# Altium PCB Hardware_PID.PcbDoc
Units mil, origin at the board's own origin, x right, y up, seen from the top; angles counter-clockwise.
Board outline 6000 x 4000 mil, 2 copper layers (Top Layer, Bottom Layer); 50 components, 21 nets, 300 pads, 0 vias.
Unrouted connection lines stored in the file: 48.
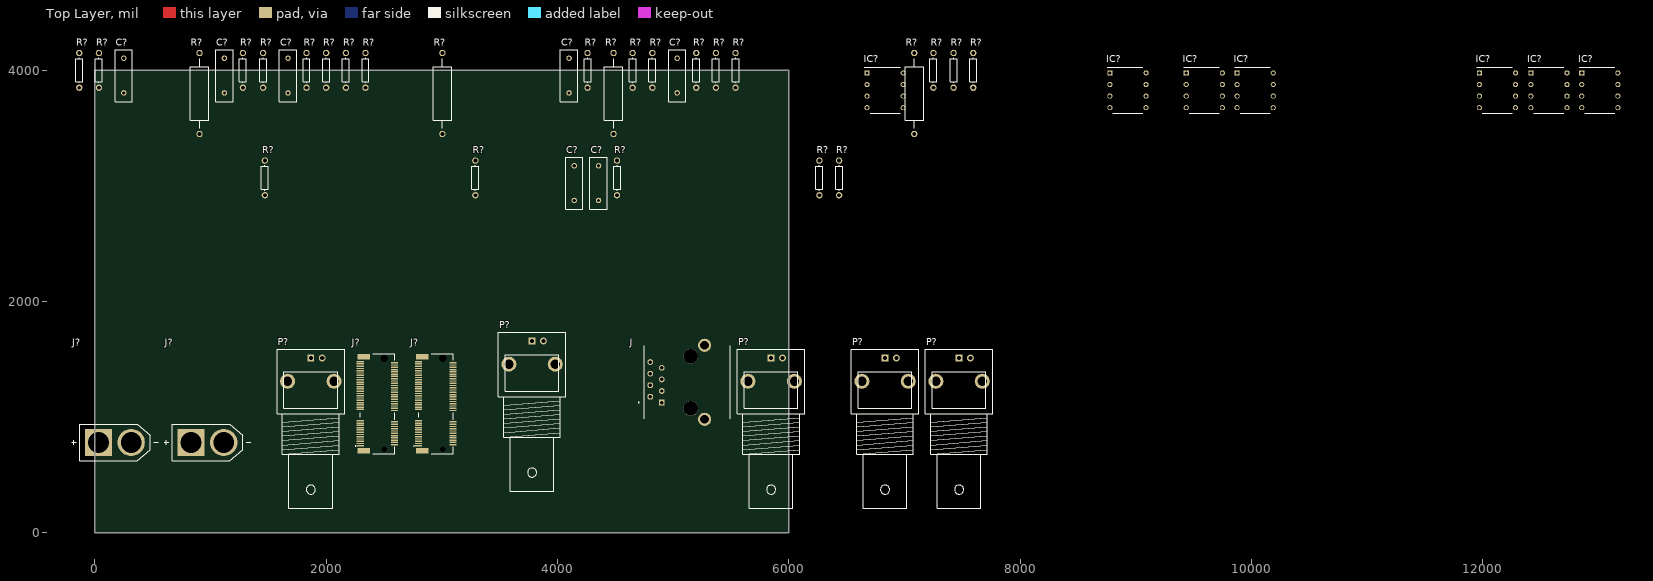
[diagram p0: Top Layer view]
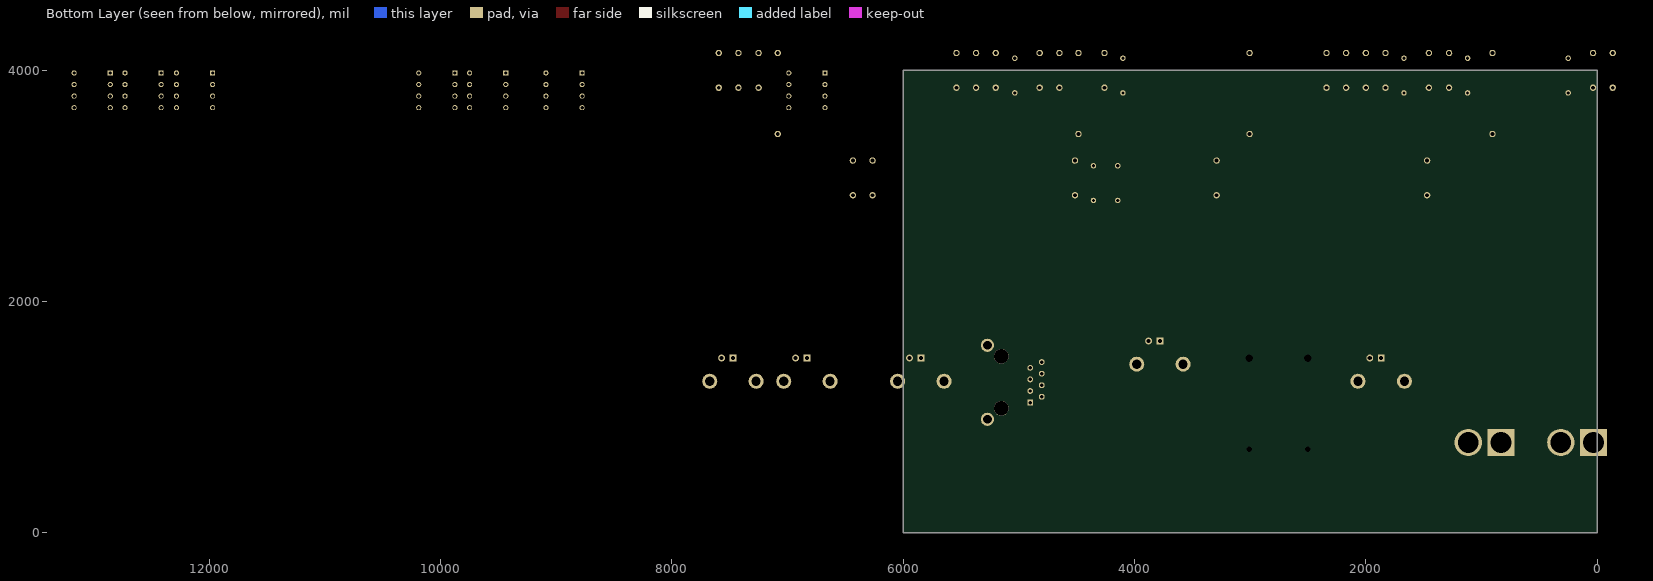
[diagram p1: Bottom Layer view, seen from below]

## Layer stack, top to bottom
Top Solder: solder mask 0.4, Solder Resist, Dk 3.5
Top Layer: signal copper 1.4
Dielectric 1: dielectric 12.6, FR-4, Dk 4.8
Bottom Layer: signal copper 1.4
Bottom Solder: solder mask 0.4, Solder Resist, Dk 3.5

## Board outline
0,0 6000,0 6000,4000 0,4000

## Design rules (kind name [scope] priority, off if disabled: settings)
Clearance [All] p1: gap=10 ignorepadtopadclearanceinfootprint=FALSE except(0: Arc-Hole Track-Hole SMDPad-Hole THPad-Hole Via-Hole Fill-Hole Poly-Hole Region-Hole Text-Hole)
PolygonConnect [All] p1: connectstyle=Relief reliefconductorwidth=10 reliefentries=4 polygonreliefangle="90 Angle" airgapwidth=10
RoomDefinition Sheet2 [InComponentClass('Sheet2')] p1: confinementstyle=ConfineIn formatcopy=TRUE lockcomponents=FALSE outline 6082.8,2647.48 13947.8,2647.48 13947.8,4147.48 6082.8,4147.48
RoomDefinition Sheet1 [InComponentClass('Sheet1')] p2: confinementstyle=ConfineIn formatcopy=TRUE lockcomponents=FALSE outline -212.8,202.52 7777.2,202.52 7777.2,2627.52 -212.8,2627.52
RoutingVias [All] p1: holewidth=28 width=50 viastyle="Through Hole" minholewidth=28 minwidth=50 maxholewidth=28 maxwidth=50
SolderMaskExpansion [All] p1: expansion=4 istentingtop=FALSE
Width [All] p1: maxlimit=10 minlimit=10 preferedwidth=10
30 further rules are at their usual default settings.

## Classes and differential pairs
component class Sheet2: C? IC? R?
component class Sheet1: C? J J? P? R? U?

## Components (designator, comment, footprint, x,y, rotation, side; value= is the part's Value field where it differs from the comment)
C? "Cap" RAD-0.3 5035,3955 r90 top value=1u
C? "Cap" RAD-0.3 4355,3025 r90 top value=10nF
C? "Cap" RAD-0.3 4145,3025 r90 top value=10nF
C? "Cap" RAD-0.3 1670,3955 r90 top value=1u
C? "Cap" RAD-0.3 250,3955 r90 top value=100pF
C? "Cap" RAD-0.3 4100,3955 r90 top value=1u
C? "Cap" RAD-0.3 1120,3955 r90 top value=1n
IC? "UA741CP" DIP794W53P254L959H508Q8N 8932.8,3827.48 r0 top
IC? "UA741CP" DIP794W53P254L959H508Q8N 12127.8,3827.48 r0 top
IC? "UA741CP" DIP794W53P254L959H508Q8N 13012.8,3827.48 r0 top
IC? "UA741CP" DIP794W53P254L959H508Q8N 10032.8,3827.48 r0 top
IC? "UA741CP" DIP794W53P254L959H508Q8N 12572.8,3827.48 r0 top
IC? "UA741CP" DIP794W53P254L959H508Q8N 6832.8,3827.48 r0 top
IC? "UA741CP" DIP794W53P254L959H508Q8N 9592.8,3827.48 r0 top
J "RJ45-8N3-B" TE_RJ45-8N3-B 4902.2,1302.52 r90 top
J? "2199230-4" 21992304 2942.2,1117.52 r90 top
J? "XT60-M" AMASS_XT60-M 172.2,782.52 r0 top
J? "XT60-M" AMASS_XT60-M 972.2,782.52 r0 top
J? "2199230-4" 21992304 2437.2,1117.52 r90 top
P? "BNC" "BNC_RA CON" 3780,1660 r90 top
P? "BNC" "BNC_RA CON" 7472.2,1512.52 r90 top
P? "BNC" "BNC_RA CON" 5847.2,1512.52 r90 top
P? "BNC" "BNC_RA CON" 6832.2,1512.52 r90 top
P? "BNC" "BNC_RA CON" 1867.2,1512.52 r90 top
R? "Res1" AXIAL-0.3 -135,4000 r90 top value=1K
R? "Res1" AXIAL-0.3 7425,4000 r90 top value=1K
R? "Res1" AXIAL-0.3 1830,4000 r90 top value=4.7K
R? "Res1" AXIAL-0.3 5200,4000 r90 top value=4.7K
R? "Res Adj1" AXIAL-0.7 4485,3800 r90 top value=4.7K
R? "Res1" AXIAL-0.3 1280,4000 r90 top value=4.7K
R? "Res1" AXIAL-0.3 5540,4000 r90 top value=1K
R? "Res1" AXIAL-0.3 6265,3070 r90 top value=75
R? "Res1" AXIAL-0.3 4515,3070 r90 top value=75
R? "Res1" AXIAL-0.3 3290,3070 r90 top value=75
R? "Res1" AXIAL-0.3 2000,4000 r90 top value=4.7K
R? "Res1" AXIAL-0.3 6435,3070 r90 top value=75
R? "Res1" AXIAL-0.3 1470,3070 r90 top value=75
R? "Res1" AXIAL-0.3 5370,4000 r90 top value=1K
R? "Res1" AXIAL-0.3 1455,4000 r90 top value=1K
R? "Res Adj1" AXIAL-0.7 7085,3800 r90 top value=1K
R? "Res1" AXIAL-0.3 4650,4000 r90 top value=2.37K
R? "Res1" AXIAL-0.3 4820,4000 r90 top value=1K
R? "Res Adj1" AXIAL-0.7 3005,3800 r90 top value=1K
R? "Res1" AXIAL-0.3 35,4000 r90 top value=1K
R? "Res1" AXIAL-0.3 2340,4000 r90 top value=4.7K
R? "Res1" AXIAL-0.3 4260,4000 r90 top value=4.7K
R? "Res1" AXIAL-0.3 7595,4000 r90 top value=2K
R? "Res1" AXIAL-0.3 2170,4000 r90 top value=4.7K
R? "Res Adj1" AXIAL-0.7 905,3800 r90 top value=1K
R? "Res1" AXIAL-0.3 7250,4000 r90 top value=1K

## Footprints (in the part's own frame and the unit in brackets; to place one, negate y for a bottom-side part, rotate by r counter-clockwise, add the part's x,y. Pads: shape width x height; smd on the part's side, far side on the other; paste and mask are expansions set on the pad)
21992304 [mm]
  rect 0.3x1.55 smd: 1(-9.25,3.625) 2(-9,-3.925) 3(-8.75,3.625) 4(-8.5,-3.925) 5(-8.25,3.625) 6(-8,-3.925) 7(-7.75,3.625) 8(-7.5,-3.925) 9(-7.25,3.625) 10(-7,-3.925) 11(-6.75,3.625) 12(-6.5,-3.925) 13(-6.25,3.625) 14(-6,-3.925) 15(-5.75,3.625) 16(-5.5,-3.925) 17(-5.25,3.625) 18(-5,-3.925) 19(-4.75,3.625) 20(-4.5,-3.925) 21(-4.25,3.625) 22(-4,-3.925) 23(-3.75,3.625) 32(-1.5,-3.925) 33(-1.25,3.625) 34(-1,-3.925) 35(-0.75,3.625) 36(-0.5,-3.925) 37(-0.25,3.625) 38(0,-3.925) 39(0.25,3.625) 40(0.5,-3.925) 41(0.75,3.625) 42(1,-3.925) 43(1.25,3.625) 44(1.5,-3.925) 45(1.75,3.625) 46(2,-3.925) 47(2.25,3.625) 48(2.5,-3.925) 49(2.75,3.625) 50(3,-3.925) 51(3.25,3.625) 52(3.5,-3.925) 53(3.75,3.625) 54(4,-3.925) 55(4.25,3.625) 56(4.5,-3.925) 57(4.75,3.625) 58(5,-3.925) 59(5.25,3.625) 60(5.5,-3.925) 61(5.75,3.625) 62(6,-3.925) 63(6.25,3.625) 64(6.5,-3.925) 65(6.75,3.625) 66(7,-3.925) 67(7.25,3.625) 68(7.5,-3.925) 69(7.75,3.625) 70(8,-3.925) 71(8.25,3.625) 72(8.5,-3.925) 73(8.75,3.625) 74(9,-3.925) 75(9.25,3.625)
  rect 1.2x2.75 smd: 76(-10.35,2.85) 77(10.35,2.85)
  round 0.575 hole 1.15 unplated: 78(-10,-1.65)
  round 0.825 hole 1.65 unplated: 79(10,-1.65)
  silkscreen extent -10.95,-3.93 10.95,4.7, body extent -10.95,-4.5 10.95,4.2, height 4.13
AMASS_XT60-M [mm]
  round 6 hole 4.55: N(3.6,0)
  rect 6x6 hole 4.55: P(-3.6,0)
  silkscreen extent -9.5,-4.05 9.5,4.05, body extent -4.05,0 4.05,20.5, height 7.75
AXIAL-0.3 [mm] "Axial Device, Thru-Hole; 2 Leads; 0.3 in Pin Spacing"
  round 1.4 hole 0.85: 1(-3.81,0) 2(3.81,0)
  silkscreen extent -2.77,-0.76 2.77,0.76
AXIAL-0.7 [mm] "Axial Device, Thru-Hole; 2 Leads; 0.7 in Pin Spacing"
  round 1.4 hole 0.85: 1(-8.89,0) 2(8.89,0)
  silkscreen extent -7.62,-2.03 7.62,2.03
"BNC_RA CON" [mm] "Connector; BNC Elbow"
  rect 1.5x1.5 hole 0.9: 1(0,0)
  round 3.3 hole 2: 2(-5.1,-5.1) 2(-5.1,5.1)
  round 1.5 hole 0.9: 2(0,-2.5)
  silkscreen extent -33,-7.4 1.9,7.4
DIP794W53P254L959H508Q8N [mm]
  rect 1.13x1.13 hole 0.73: 1(-3.97,3.81)
  round 1.13 hole 0.73: 2(-3.97,1.27) 3(-3.97,-1.27) 4(-3.97,-3.81) 5(3.97,-3.81) 6(3.97,-1.27) 7(3.97,1.27) 8(3.97,3.81)
  silkscreen extent -4.53,-5.08 3.3,5.08, body extent -4.1,-4.64 4.1,4.64, height 4.21
RAD-0.3 [mm] "Radial Cap, Thru-Hole; 2 Leads; 0.3 in Pin Spacing"
  round 1.2 hole 0.7: 1(-3.81,0) 2(3.81,0)
  silkscreen extent -5.71,-1.91 5.71,1.91
TE_RJ45-8N3-B [mil]
  rect 50x50 hole 30: 1(-175,0)
  round 50 hole 30: 2(-125,100) 3(-75,0) 4(-25,100) 5(25,0) 7(125,0) 8(175,100)
  round 49.92 hole 29.92: 6(75,100)
  round 114 hole 76: 9(-320,-370) 10(320,-370)
  round 128 hole 128 unplated: ""(-225,-250) ""(225,-250)
  silkscreen extent -315,-590 315,204

## Part data
C? C? C? C? C? C? C?: "Capacitor", LatestRevisionDate=17-Jul-2002, LatestRevisionNote="Re-released for DXP Platform.", PackageDescription="Radial Cap, Thru-Hole; 2 Leads; 0.3 in Pin Spacing", PackageReference=RAD-0.3, Published=8-Jun-2000, Publisher="Altium Limited"
IC? IC? IC? IC? IC? IC? IC?: "Integrated Circuit", Manufacturer_Name="Texas Instruments", Mouser2 Part Number=595-UA741CP, Datasheet Link=http://www.ti.com/lit/ds/symlink/ua741.pdf, Height=5.08mm, Manufacturer_Part_Number=UA741CP, Mouser2 Price/Stock=https://www.mouser.com/Search/Refine.aspx?Keyword=595-UA741CP
J: "Connector RJ-45 Female 8 Position 2.54mm Solder Right Angle Through Hole 8 Terminal", Package=None, Availability=Unavailable, MF="TE Connectivity", MP=RJ45-8N3-B, Price=None, SnapEDA_Link=https://www.snapeda.com/parts/RJ45-8N3-B/TE%20Connectivity%20Corcom%20Filters/view-part/2770351/?ref=snap, TE_purchase_URL=https://www.te.com/usa-en/product-1-6609212-3.html?te_bu=Cor&te_type=disp&te_campaign=seda_glo_cor-seda-global-disp-prtnr-fy19-seda-model-bom-cta_sma-317_1&elqCampaignId=32493
J? J?: "Connector", Manufacturer_Name="TE Connectivity", Mouser2 Part Number=571-2199230-4, Datasheet Link=https://componentsearchengine.com//2199230-4.pdf, Manufacturer_Part_Number=2199230-4, Mouser2 Price/Stock=https://www.mouser.com/Search/Refine.aspx?Keyword=571-2199230-4
J? J?: "Plug; DC supply; XT60; male; PIN: 2; for cable; soldered; 30A; 500V", Package=Package, Availability="Not in stock", Check_prices=https://www.snapeda.com/parts/XT60-M/AMASS/view-part/?ref=eda, MF=AMASS, MP=XT60-M, Price=None, SnapEDA_Link=https://www.snapeda.com/parts/XT60-M/AMASS/view-part/?ref=snap
P? P? P? P? P?: "BNC Elbow Connector", LatestRevisionDate=17-Jul-2002, LatestRevisionNote="Re-released for DXP Platform.", Publisher="Altium Limited"
R? R? R? R? R? R? R? R? R? R? R? R? R? R? R? R? R? R? R? R? R? R?: "Resistor", LatestRevisionDate=17-Jul-2002, LatestRevisionNote="Re-released for DXP Platform.", PackageDescription="Axial Device, Thru-Hole; 2 Leads; 0.3 in Pin Spacing", PackageReference=AXIAL-0.3, Published=8-Jun-2000, Publisher="Altium Limited"
R? R? R? R?: "Variable Resistor", LatestRevisionDate=17-Jul-2002, LatestRevisionNote="Re-released for DXP Platform.", PackageDescription="Axial Device, Thru-Hole; 2 Leads; 0.7 in Pin Spacing", PackageReference=AXIAL-0.7, Published=8-Jun-2000, Publisher="Altium Limited", Set Position=0.5

## Nets (pads, with @x,y where several pads share a name; then routed paths per layer and width w, separated by ;. In a path a pad name is that pad's centre, name@x,y a point inside that pad or via, vN(x,y) a via of type N, cw(c..) or ccw(c..) an arc to the next point about the centre after c; other vN are vias at no path point)
GND: C?.1@1670,3805 C?.2@4145,3175 C?.2@4355,3175 IC?.3@9436.5,3777.48 IC?.3@11971.5,3777.48 IC?.3@12416.5,3777.48 P?.2 R?.1@1280,3850 R?.1@4260,3850 R?.1@6265,2920 R?.1@6435,2920 R?.1@7425,3850 R?.2@1470,3220 R?.2@3290,3220 R?.2@4515,3220
NetC?_1: C?.1@4145,2875 J?.76 J?.N@1113.94,782.52
NetC?_2: C?.2@1120,4105 IC?.6@6989.09,3777.48 R?.1@-135,3850 R?.2@905,4150
NetIC?_2: IC?.2@9876.5,3877.48 R?.1@4485,3450 R?.2@4260,4150
NetIC?_3: IC?.3@8776.5,3777.48 R?.2@1280,4150 R?.2@1830,4150
NetIC?_4: IC?.4@12856.5,3677.48 IC?.7@13169.09,3877.48
NetIC?_6: IC?.6@9089.09,3777.48 IC?.6@12284.09,3777.48 R?.1@35,3850 R?.1@3005,3450 R?.1@5370,3850 R?.1@5540,3850 R?.2@2340,4150 R?.2@7085,4150
NetIC?_7: IC?.7@10189.09,3877.48 IC?.7@12729.09,3877.48
NetJ?_68: J?.68@2591.73,1412.8
NetJ?_70: J?.70@3096.73,1432.48
NetJ?_72: J?.72@3096.73,1452.17
NetJ?_74: J?.74@2591.73,1471.85
NetJ?_N: J?.N@313.94,782.52
NetJ?_P: J?.P@30.47,782.52
NetJ_1: J.1
NetJ_3: J.3
NetP?_1: P?.1@3780,1660 R?.1@3290,2920
NetU?_1: 
NetU?_10: 
NetU?_11: 
NetU?_20: 
pads on no net: C?.1@250,3805 C?.1@1120,3805 C?.1@4100,3805 C?.1@4355,2875 C?.1@5035,3805 C?.2@250,4105 C?.2@1670,4105 C?.2@4100,4105 C?.2@5035,4105 IC?.1 IC?.2@6676.5,3877.48 IC?.2@8776.5,3877.48 IC?.2@9436.5,3877.48 IC?.2@11971.5,3877.48 IC?.2@12416.5,3877.48 IC?.2@12856.5,3877.48 IC?.3@6676.5,3777.48 IC?.3@9876.5,3777.48 IC?.3@12856.5,3777.48 IC?.4@6676.5,3677.48 IC?.4@8776.5,3677.48 IC?.4@9436.5,3677.48 IC?.4@9876.5,3677.48 IC?.4@11971.5,3677.48 IC?.4@12416.5,3677.48 IC?.5 IC?.6@9749.09,3777.48 IC?.6@10189.09,3777.48 IC?.6@12729.09,3777.48 IC?.6@13169.09,3777.48 IC?.7@6989.09,3877.48 IC?.7@9089.09,3877.48 IC?.7@9749.09,3877.48 IC?.7@12284.09,3877.48 IC?.8 J. J.2 J.4 J.5 J.6 J.7 J.8 J.9 J.10 J?.1 J?.2 J?.3 J?.4 J?.5 J?.6 J?.7 J?.8 J?.9 J?.10 J?.11 J?.12 J?.13 J?.14 J?.15 J?.16 J?.17 J?.18 J?.19 J?.20 J?.21 J?.22 J?.23 J?.32 J?.33 J?.34 J?.35 J?.36 J?.37 J?.38 J?.39 J?.40 J?.41 J?.42 J?.43 J?.44 J?.45 J?.46 J?.47 J?.48 J?.49 J?.50 J?.51 J?.52 J?.53 J?.54 J?.55 J?.56 J?.57 J?.58 J?.59 J?.60 J?.61 J?.62 J?.63 J?.64 J?.65 J?.66 J?.67 J?.68@3096.73,1412.8 J?.69 J?.70@2591.73,1432.48 J?.71 J?.72@2591.73,1452.17 J?.73 J?.74@3096.73,1471.85 J?.75 J?.77 J?.78 J?.79 J?.P@830.47,782.52 P?.1@1867.2,1512.52 P?.1@5847.2,1512.52 P?.1@6832.2,1512.52 P?.1@7472.2,1512.52 R?.1@905,3450 R?.1@1455,3850 R?.1@1470,2920 R?.1@1830,3850 R?.1@2000,3850 R?.1@2170,3850 R?.1@2340,3850 R?.1@4515,2920 R?.1@4650,3850 R?.1@4820,3850 R?.1@5200,3850 R?.1@7085,3450 R?.1@7250,3850 R?.1@7595,3850 R?.2@35,4150 R?.2@1455,4150 R?.2@2000,4150 R?.2@2170,4150 R?.2@3005,4150 R?.2@4485,4150 R?.2@4650,4150 R?.2@4820,4150 R?.2@5200,4150 R?.2@5370,4150 R?.2@5540,4150 R?.2@6265,3220 R?.2@6435,3220 R?.2@7250,4150 R?.2@7425,4150 R?.2@7595,4150 R?.2@-135,4150